# EAGLE board ad5272_arduino_ethernet (EAGLE 8.1.1)
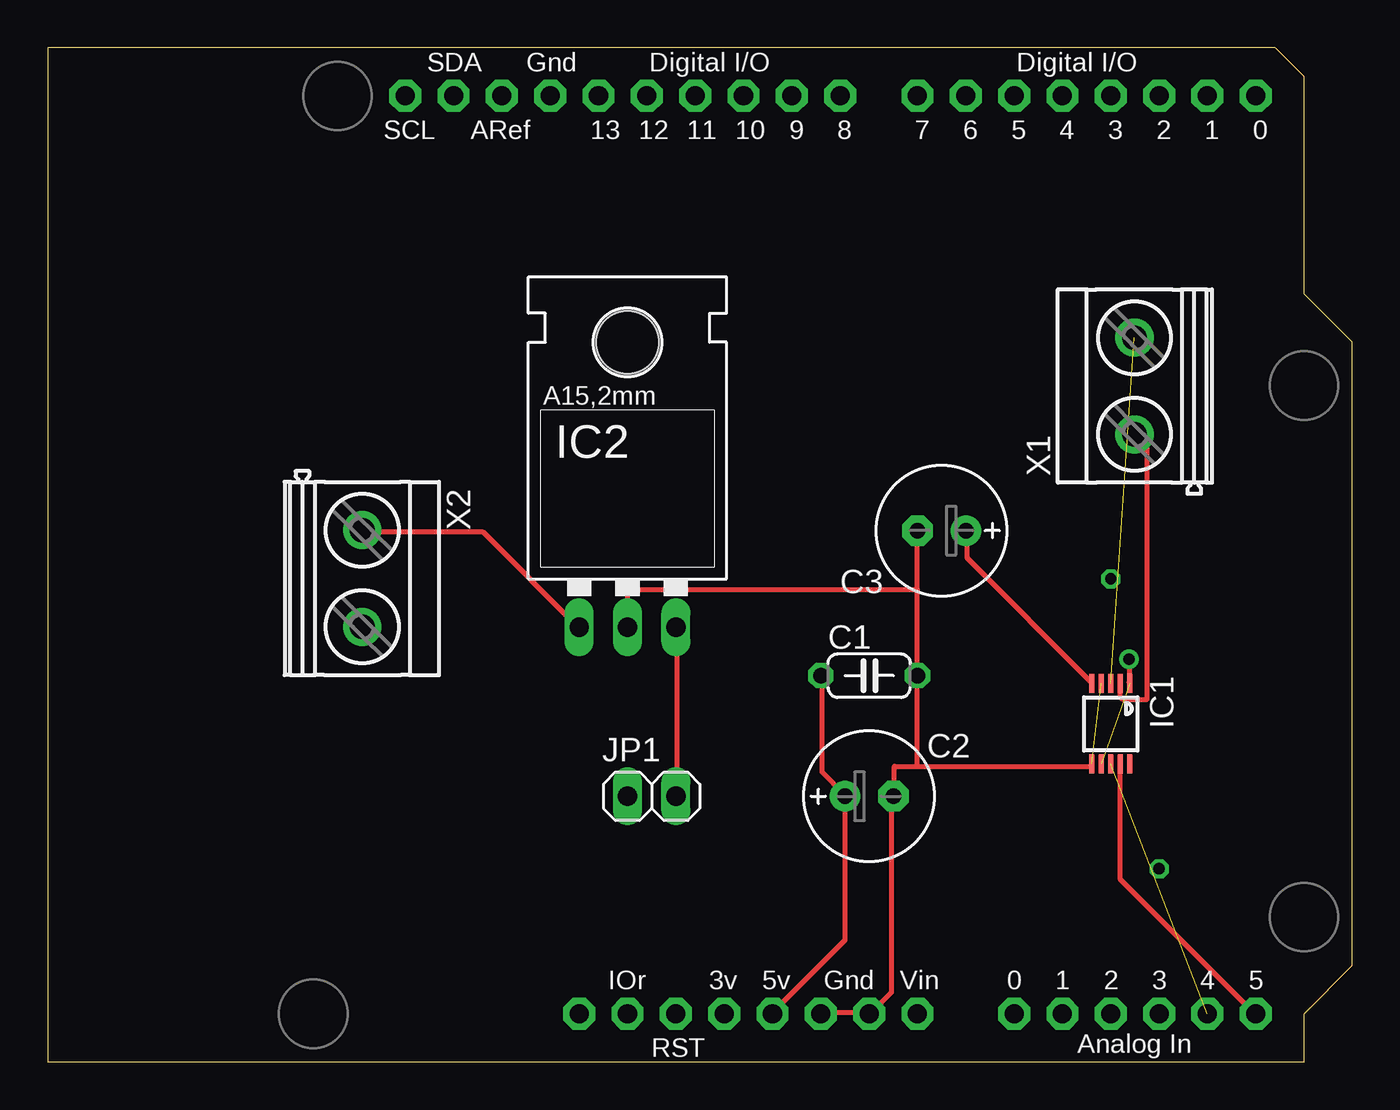
[diagram p0: board, top side]
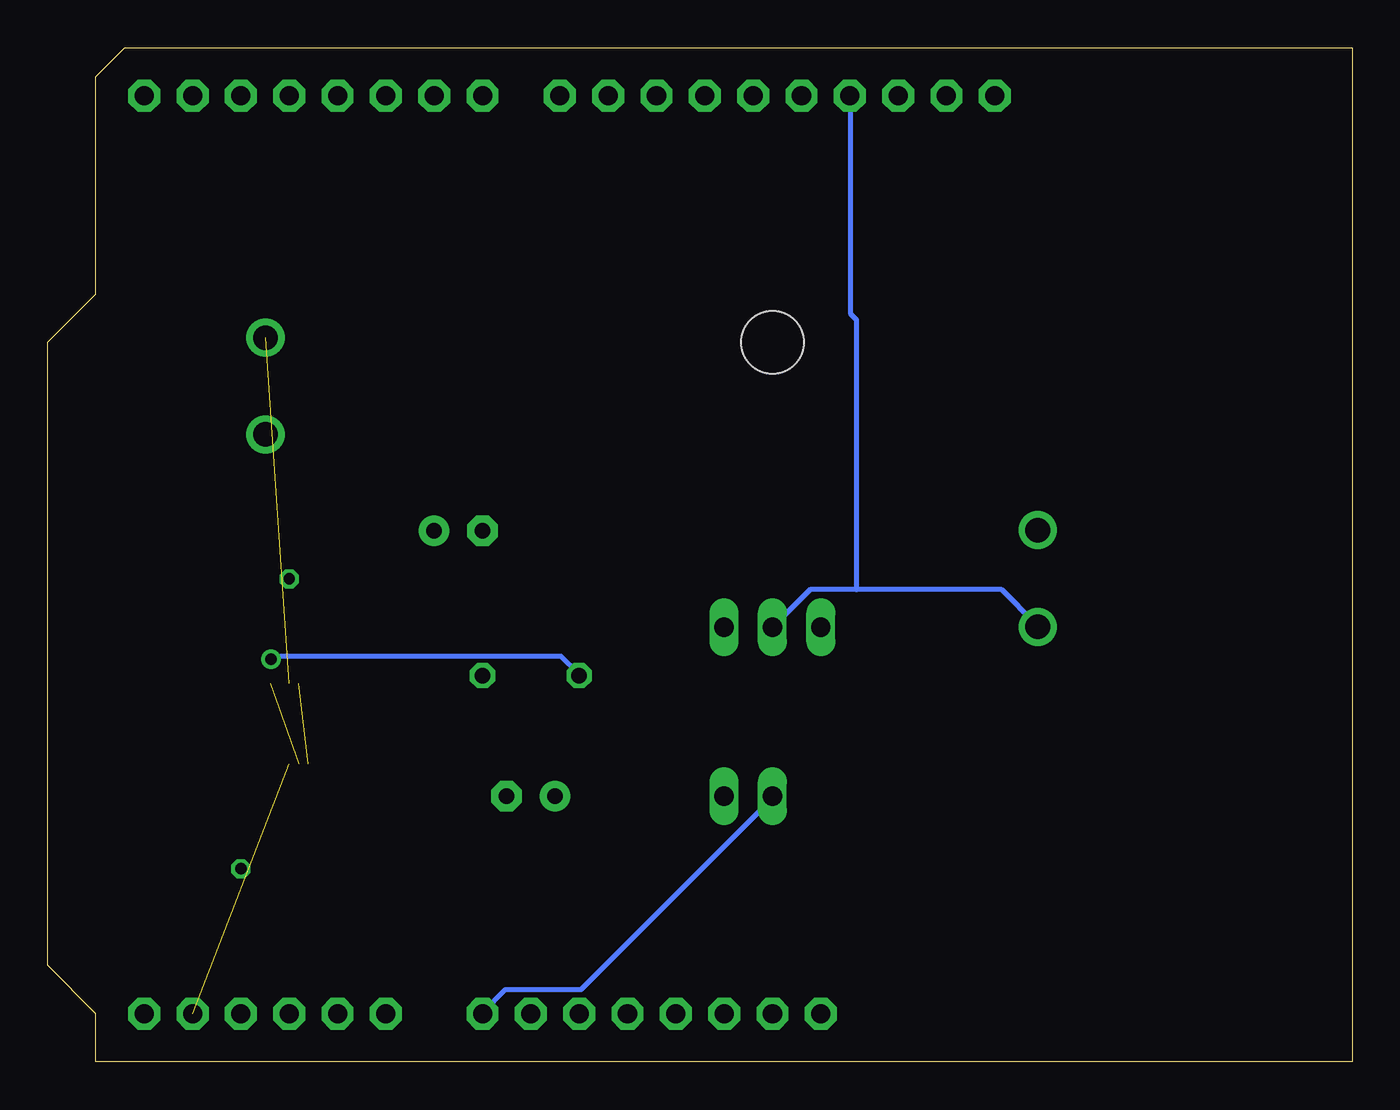
[diagram p1: board, bottom side, seen from below]

Size 68.58 x 53.34 mm. Coordinates in mm from the lower left corner, seen from the top.
Copper layers (1*16): Top 0.035mm / dielectric 1.5mm / Bottom 0.035mm
Design rules "default": minimum track width 10mil, minimum drill 24mil, track to track 8mil, track to pad 8mil, pad to pad 8mil, via to via 8mil, smd to smd 8mil, copper to edge 40mil, drill to drill 8mil, minimum pad ring 10mil, minimum via ring 8mil, stop-mask expansion 4mil, vias tented up to drill 0mil, thermal gap 10mil

## Footprints (pad centres in the part's own frame; a part is rotated, then mirrored left to right if it is on the bottom)
C050-024X044 = drill 0.813 octagon: 1 -2.54,0; 2 2.54,0
E2,5-7 = drill 0.813 pad 1.6: + -1.27,0 | drill 0.813 pad 1.6 octagon: - 1.27,0
MSOP10 = smd 0.25 x 1: 1 -1,-2.113; 2 -0.5,-2.113; 3 0,-2.113; 4 0.5,-2.113; 5 1,-2.113; 6 1,2.113; 7 0.5,2.113; 8 0,2.113; 9 -0.5,2.113; 10 -1,2.113
78XXL = drill 1.016 long: GND 0,-3.81; IN -2.54,-3.81; OUT 2.54,-3.81 | hole 3.302: 0,11.176
1X02 = drill 1.016 long: 1 -1.27,0; 2 1.27,0
ARDUINOR3 = drill 1 pad 1.676 octagon: 3V 35.56,2.54; 5V 38.1,2.54; A0 50.8,2.54; A1 53.34,2.54; A2 55.88,2.54; A3 58.42,2.54; A4 60.96,2.54; A5 63.5,2.54; AREF 23.876,50.8; D0 63.5,50.8; D1 60.96,50.8; D2 58.42,50.8; D3 55.88,50.8; D4 53.34,50.8; D5 50.8,50.8; D6 48.26,50.8; D7 45.72,50.8; D8 41.656,50.8; D9 39.116,50.8; D10 36.576,50.8; D11 34.036,50.8; D12 31.496,50.8; D13 28.956,50.8; GND 26.416,50.8; GND1 43.18,2.54; GND2 40.64,2.54; IOREF 30.48,2.54; RESERVED 27.94,2.54; RESET 33.02,2.54; SCL 18.796,50.8; SDA 21.336,50.8; VIN 45.72,2.54
MKDSN1,5/2-5,08 = drill 1.3 pad 2: 1 -2.561,0.025; 2 2.519,0.025

## Placement (x,y rotation side)
C1  [C050-024X044]  43.18,20.32 0 top
C2  [E2,5-7]  43.18,13.97 0 top
C3  [E2,5-7]  46.99,27.94 180 top
IC1  AD5272  [MSOP10]  55.88,17.78 180 top
IC2  [78XXL]  30.48,26.67 0 top
JP1  [1X02]  31.75,13.97 0 top
U1  ARDUINOR3-DIMENSION  [ARDUINOR3]  0,0 0 top
X1  MKDSN1,5/2-5,08  [MKDSN1,5/2-5,08]  57.15,35.56 90 top
X2  MKDSN1,5/2-5,08  [MKDSN1,5/2-5,08]  16.51,25.4 270 top

## Library data of the parts
C1-C3 = rcl
IC1 = aidj; MPN: AD7992BRMZ-0; OC_FARNELL: 1078311; OC_NEWARK: 31M4422
IC2 = v-reg
JP1 = pinhead
U1 = adafruit
X1 X2 = con-phoenix-508; MPN: MKDSN 1,5/2-5.08; OC_FARNELL: 1792903; OC_NEWARK: 30M2397

## Nets
3V: U1.3V
GND: C1.2 C2.- C3.- IC1.4 IC1.6 IC2.GND U1.GND U1.GND1 U1.GND2 X2.2
N$1: IC1.9 U1.A5
N$2: IC1.8 U1.A4
N$3: IC2.OUT JP1.2
N$4: C3.+ IC1.5
N$5: C1.1 C2.+ IC1.1 IC1.7 U1.5V
N$6: IC1.3 X1.2
N$7: IC1.2 X1.1
N$8: JP1.1 U1.VIN
VCC: IC2.IN X2.1

## Tracks (layer width: path | path; a pad name or v marks a point on that pad's centre or on a via)
GND  (1 unrouted)
  Top 0.254: U1.GND2 40.69,2.59 43.13,2.59 U1.GND1 43.28,2.59 44.35,3.66 44.35,13.87 C2.- 44.5,14.02 44.5,15.54 45.72,15.54 | 45.72,15.54 54.86,15.54 IC1.6 | 45.72,15.54 C1.2 45.72,24.84 | 45.72,24.84 C3.- | 45.72,24.84 30.48,24.84 IC2.GND
  Bottom 0.254: IC2.GND 28.5,24.84 26.06,24.84 | 26.06,24.84 18.44,24.84 16.61,23.01 X2.2 | 26.06,24.84 26.06,39.01 26.37,39.32 26.37,50.75 U1.GND
N$1
  Top 0.254: IC1.9 56.39,15.54 56.39,9.6 63.4,2.59 U1.A5
N$2  (1 unrouted)
N$3
  Top 0.254: JP1.2 33.07,14.02 33.07,22.86 IC2.OUT
N$4
  Top 0.254: IC1.5 54.86,19.96 48.31,26.52 48.31,27.89 C3.+
N$5  (via drill 0.61)  (1 unrouted)
  Top 0.254: v56.84,21.18 56.84,19.96 IC1.1 | C1.1 40.69,20.27 40.69,15.24 41.91,14.02 C2.+ 41.91,6.4 38.1,2.59 U1.5V
  Bottom 0.254: v56.84,21.18 56.69,21.34 41.6,21.34 40.69,20.42 C1.1
N$6  (1 unrouted)
N$7
  Top 0.254: IC1.2 56.39,19.81 56.39,19.2 56.54,19.05 57.76,19.05 57.76,32.31 57.15,32.92 X1.1
N$8
  Bottom 0.254: JP1.1 30.48,13.87 40.54,3.81 44.5,3.81 45.72,2.59 U1.VIN
N$9  (via drill 0.6 pad 0.61)
  other vias: 55.88,25.4
N$10  (via drill 0.6 pad 0.61)
  other vias: 58.42,10.16
VCC
  Top 0.254: IC2.IN 27.89,22.86 22.86,27.89 16.61,27.89 X2.1